# EAGLE board IOMOD-AD5593R-v2_0 (EAGLE 9.7.0)
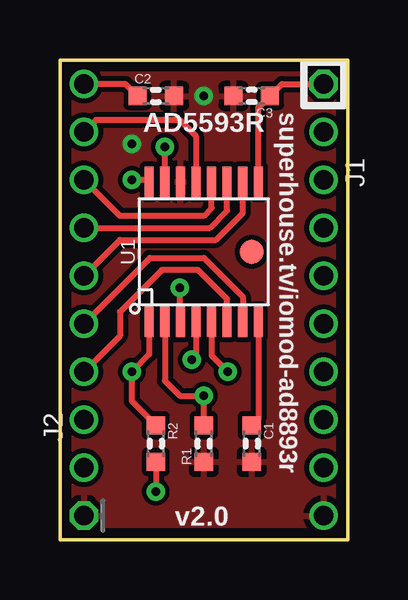
[diagram p0: board, top side]
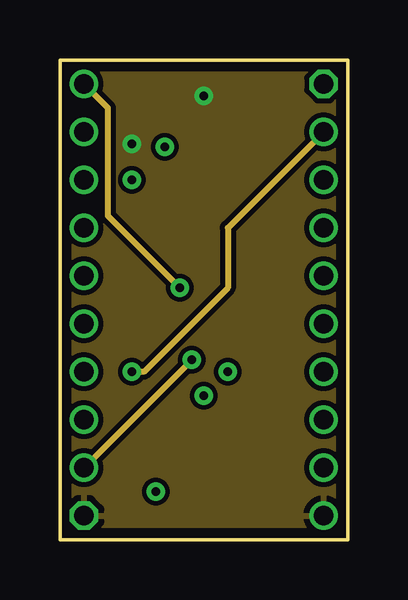
[diagram p1: board, inner layer Route2]
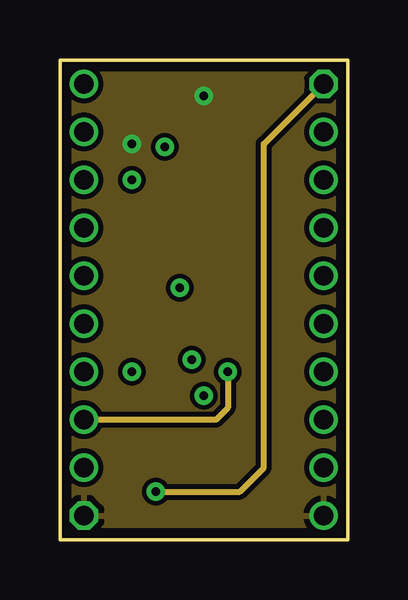
[diagram p2: board, inner layer Route15]
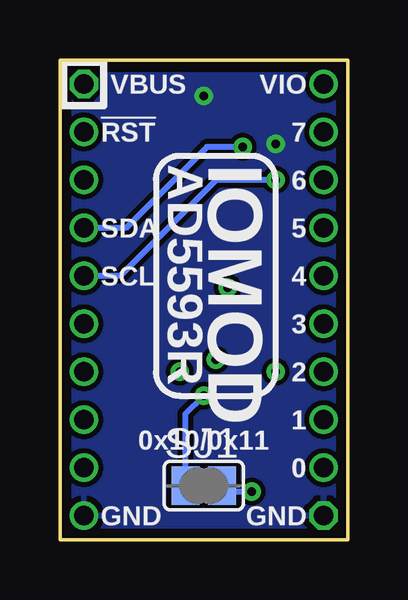
[diagram p3: board, bottom side, seen from below]

Size 12 x 20 mm. Coordinates in mm from the lower left corner, seen from the top.
Outline: 12,0 0,0 0,20 12,20 12,0
Copper layers (1+2*15+16): Top 0.035mm / dielectric 1.5mm / Route2 0.035mm / dielectric 0.15mm / Route15 0.035mm / dielectric 0.2mm / Bottom 0.035mm
Design rules "SuperHouse-Design-Rules *": minimum track width 10mil, minimum drill 24mil, track to track 8mil, track to pad 8mil, pad to pad 8mil, via to via 8mil, smd to smd 6mil, copper to edge 0.4mm, drill to drill 8mil, minimum pad ring 7mil, minimum via ring 8mil, stop-mask expansion 4mil, vias tented up to drill 0.5mm, thermal gap 10mil
Net classes: 0 Default: width 0.203 mm; 1 VCC: width 0.305 mm

## Footprints (pad centres in the part's own frame; a part is rotated, then mirrored left to right if it is on the bottom)
C0603 = smd 0.762 x 0.762: 1 -0.762,0; 2 0.762,0
FIDUCIAL-1X2.5 = smd 1 x 1: 1 0,0
1X10-2.00-P-ABOVE = drill 0.8 octagon: 1 -9,0 | drill 0.8: 2 -7,0; 3 -5,0; 4 -3,0; 5 -1,0; 6 1,0; 7 3,0; 8 5,0; 9 7,0; 10 9,0
R0603 = smd 0.762 x 0.762: 1 -0.762,0; 2 0.762,0
SJ = smd 1.168 x 1.6: 1 -0.762,0; 2 0.762,0
TSSOP16 = smd 1.27 x 0.381: 1 -2.925,2.275; 2 -2.925,1.625; 3 -2.925,0.975; 4 -2.925,0.325; 5 -2.925,-0.325; 6 -2.925,-0.975; 7 -2.925,-1.625; 8 -2.925,-2.275; 9 2.925,-2.275; 10 2.925,-1.625; 11 2.925,-0.975; 12 2.925,-0.325; 13 2.925,0.325; 14 2.925,0.975; 15 2.925,1.625; 16 2.925,2.275

## Placement (x,y rotation side)
C1  100nF  [C0603]  8,4 270 top
C2  1uF  [C0603]  4,18.5 0 top
C3  100nF  [C0603]  8,18.5 180 top
FID1  FIDUCIAL1X2.5  [FIDUCIAL-1X2.5]  8,12 0 top
J1  1-10  [1X10-2.00-P-ABOVE]  11,10 270 top
J2  11-20  [1X10-2.00-P-ABOVE]  1,10 90 top
R1  10K  [R0603]  6,4 90 top
R2  100K  [R0603]  4,4 270 top
SJ1  [SJ]  6,2.25 0 bottom
U1  AD5593R-TSSOP16  [TSSOP16]  6,12 90 top

## Library data of the parts
C1-C3 = SuperHouse-Capacitors
FID1 = SuperHouse-Symbols
J1 J2 = SuperHouse-Connectors
R1 R2 = SuperHouse-Resistors
SJ1 = SuperHouse-Jumpers
U1 = SuperHouse-ICs

## Nets
!CS: J1.6
!INT: J1.3
!RESET: J1.2 R2.1 U1.1
GND: C1.2 C2.2 C3.2 J1.10 J2.1 R1.1 U1.14
IO0: J2.2 U1.4
IO1: J2.3 U1.5
IO2: J2.4 U1.6
IO3: J2.5 U1.7
IO4: J2.6 U1.10
IO5: J2.7 U1.11
IO6: J2.8 U1.12
IO7: J2.9 U1.13
MISO: J1.8
MOSI: J1.7
N$1: R1.2 SJ1.1 U1.2
N$3: C1.1 U1.8
SCK: J1.9
SCL: J1.5 U1.16
SDA: J1.4 U1.15
VCC: C3.1 J1.1 R2.2 SJ1.2 U1.9
VIO: C2.1 J2.10 U1.3

## Tracks (layer width: path | path; a pad name or v marks a point on that pad's centre or on a via)
!RESET  (via drill 0.35)
  Top 0.254: U1.1 3.73,7.72 v3,7 3,5.76 R2.1
  Route2 0.254: J1.2 7,13 7,10.5 3.5,7 v3,7
GND  (via drill 0.35)
  other vias: 6,18.5 3,16.5
  pour Top: 0.04,0.04 11.96,0.04 11.96,19.96 0.04,19.96
  pour Bottom: 0.04,0.04 11.96,0.04 11.96,19.96 0.04,19.96
  pour Route2: 0.04,0.04 11.96,0.04 11.96,19.96 0.04,19.96
  pour Route15: 0.04,0.04 11.96,0.04 11.96,19.96 0.04,19.96
IO0  (via drill 0.35)
  Top 0.254: U1.4 5.67,7.67 v5.5,7.5
  Route2 0.254: v5.5,7.5 J2.2
IO1  (via drill 0.35)
  Top 0.254: U1.5 6.33,7.67 v7,7
  Route15 0.254: v7,7 7,5.5 6.5,5 J2.3
IO2
  Top 0.254: U1.6 6.97,10.03 5.75,11.25 4.25,11.25 2.5,9.5 2.5,8.5 J2.4
IO3
  Top 0.254: J2.5 3.75,11.75 6,11.75 7.62,10.12 U1.7
IO4
  Top 0.254: J2.6 2.5,12.5 6.5,12.5 7.62,13.62 U1.10
IO5
  Top 0.254: J2.7 6.25,13 6.97,13.72 U1.11
IO6
  Top 0.254: U1.12 6.33,13.82 6,13.5 2.5,13.5 J2.8
IO7
  Top 0.254: J2.9 1.5,17.5 5,17.5 5.67,16.82 U1.13
N$1  (via drill 0.35)
  Top 0.254: U1.2 4.38,6.62 5,6 v6,6 R1.2
  Bottom 0.254: SJ1.1 6.76,5.24 v6,6
N$3
  Top 0.254: U1.8 8.28,5.04 C1.1
SCL  (via drill 0.35)
  Top 0.254: U1.16 3.65,15 v3,15
  Bottom 0.254: v3,15 5.5,15 9.5,11 J1.5
SDA  (via drill 0.35)
  Top 0.254: U1.15 v4.38,16.38
  Bottom 0.254: v4.38,16.38 5.88,16.38 9.25,13 J1.4
VCC  (via drill 0.35)
  Top 0.254: U1.9 8.28,18.01 C3.1 9.26,19 J1.1 | R2.2 v4,2
  Route15 0.254: v4,2 7.5,2 8.5,3 8.5,16.5 J1.1
  Bottom 0.254: v4,2 4.99,2 SJ1.2
VIO  (via drill 0.35)
  Top 0.254: C2.1 2.74,19 J2.10 | U1.3 5,9.1 v5,10.5
  Route2 0.254: v5,10.5 2,13.5 2,18 J2.10

## Text on the board
tPlace: superhouse.tv/iomod-ad8893r | AD5593R | v2.0
bPlace: VIO | VBUS | 7 | !RST | IOMOD | AD5593R | 6 | 5 | SDA | 4 | SCL | 3 | 2 | 1 | 0x10/0x11 | 0 | GND | GND